# Altium PCB PCB1.PcbDoc
Units mil, origin at the board's own origin, x right, y up, seen from the top; angles counter-clockwise.
Board outline 6000 x 4000 mil, 2 copper layers (Top Layer, Bottom Layer); 17 components, 27 nets, 49 pads, 0 vias.
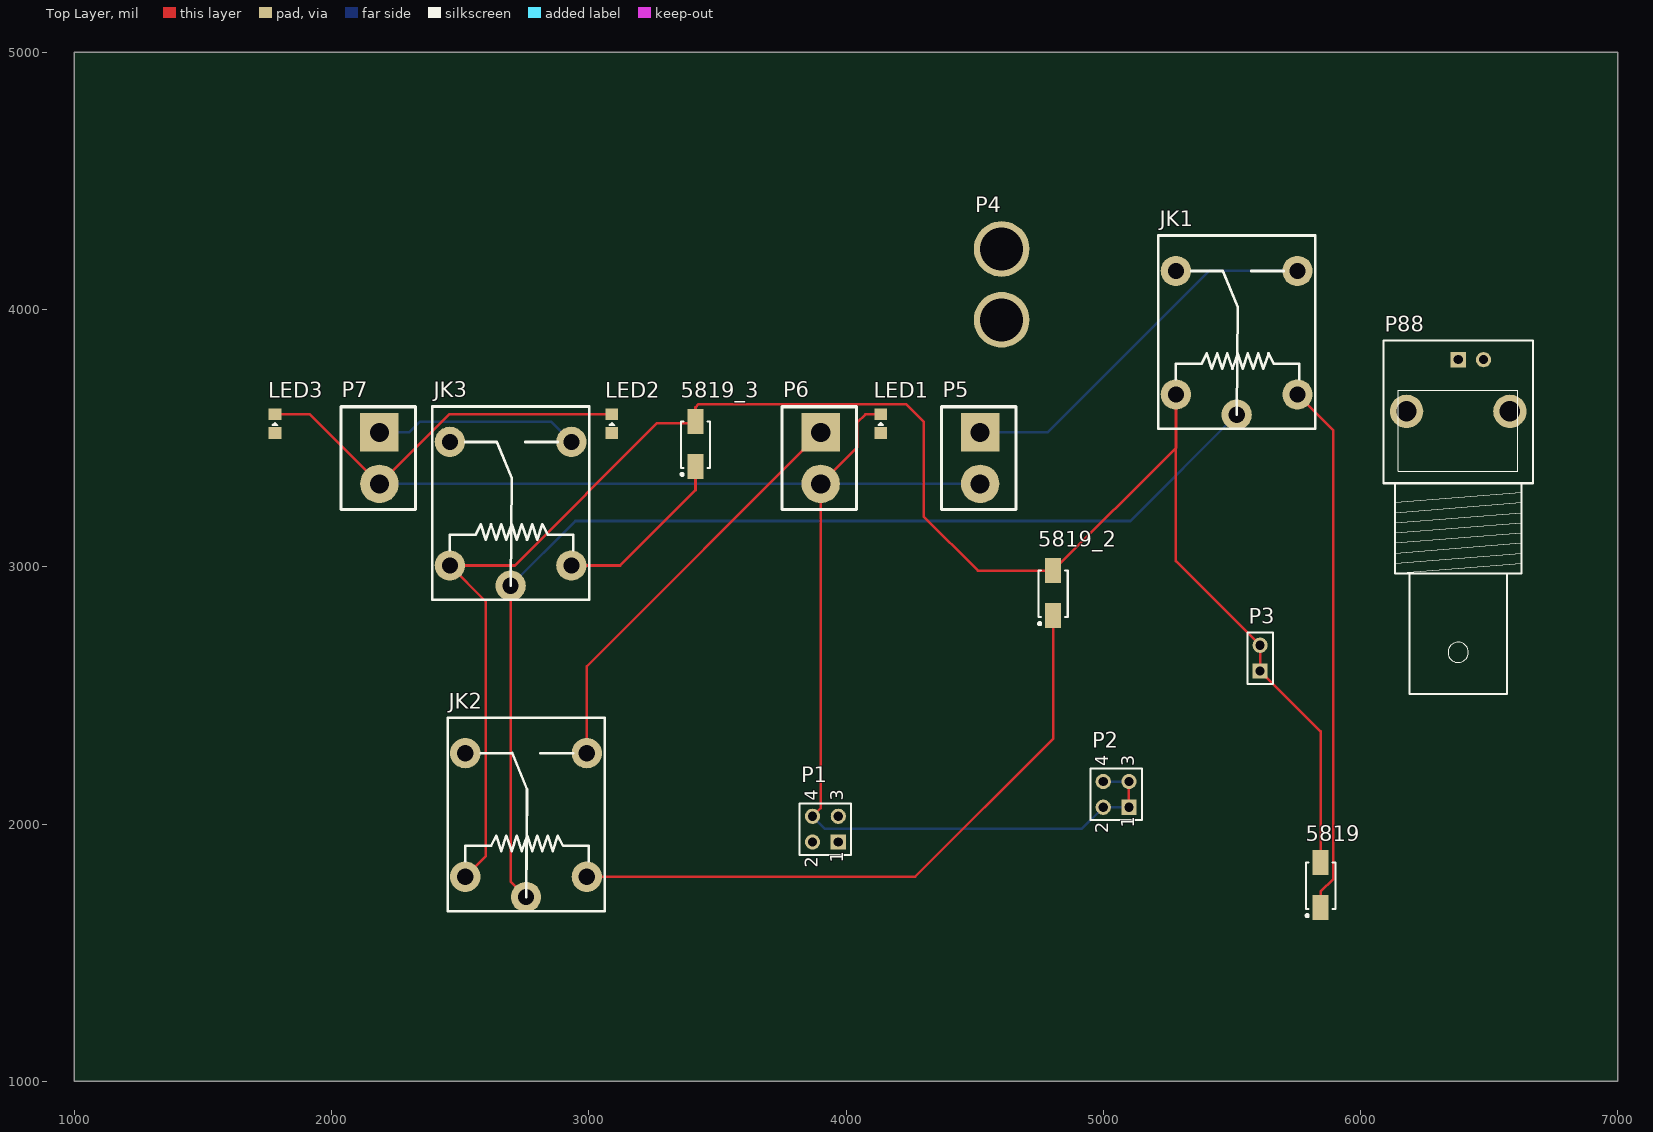
[diagram p0: Top Layer view]
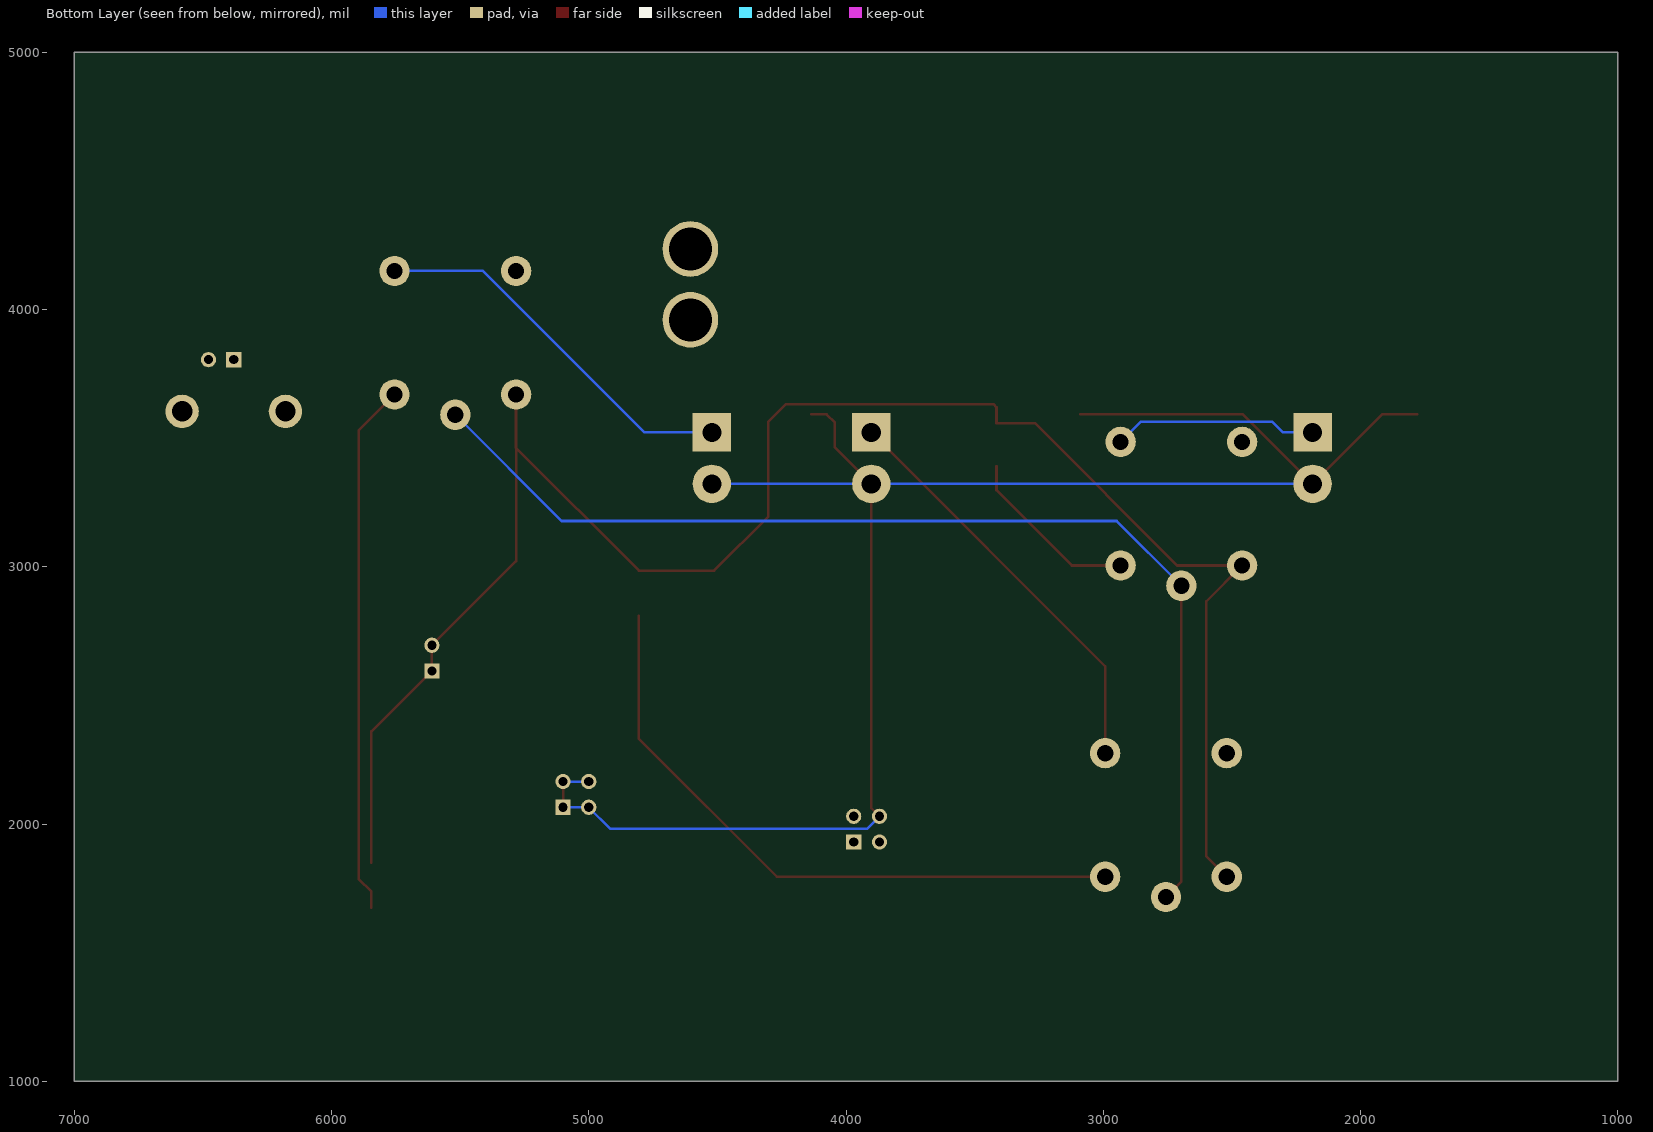
[diagram p1: Bottom Layer view, seen from below]

## Layer stack, top to bottom
Top Solder: solder mask 0.4, Solder Resist, Dk 3.5
Top Layer: signal copper 1.4
Dielectric 1: dielectric 12.6, FR-4, Dk 4.8
Bottom Layer: signal copper 1.4
Bottom Solder: solder mask 0.4, Solder Resist, Dk 3.5

## Board outline
1000,1000 7000,1000 7000,5000 1000,5000

## Design rules (kind name [scope] priority, off if disabled: settings)
Clearance [All] p1: gap=10 ignorepadtopadclearanceinfootprint=FALSE except(0: Arc-Hole Track-Hole SMDPad-Hole THPad-Hole Via-Hole Fill-Hole Poly-Hole Region-Hole Text-Hole)
PolygonConnect [All] p1: connectstyle=Relief reliefconductorwidth=10 reliefentries=4 polygonreliefangle="90 Angle" airgapwidth=10
RoutingVias [All] p1: holewidth=28 width=50 viastyle="Through Hole" minholewidth=28 minwidth=50 maxholewidth=28 maxwidth=50
SolderMaskExpansion [All] p1: expansion=4
Width [All] p1: maxlimit=10 minlimit=10 preferedwidth=10
30 further rules are at their usual default settings.

## Components (designator, comment, footprint, x,y, rotation, side; value= is the part's Value field where it differs from the comment)
5819 "SS14" SS14 5845,1760 r90 top
5819_2 "SS14" SS14 4805,2895 r90 top
5819_3 "SS14" SS14 3415,3475 r90 top
JK1 "SRD-05VDC-SL-C" SRD-C_B 5282.56,3669.68 r90 top
JK2 "SRD-05VDC-SL-C" SRD-C_B 2520,1795 r90 top
JK3 "SRD-05VDC-SL-C" SRD-C_B 2460,3005 r90 top
LED1 "LED0805" D0805 4135,3520 r90 top
LED2 "LED0805" D0805 3090,3520 r90 top
LED3 "LED0805" D0805 1780,3520 r90 top
P1 "Header 2X2" HDR2X2 3970,1930 r90 top
P2 "Header 2X2" HDR2X2 5100,2065 r90 top
P3 "Header 2" HDR1X2 5610,2595 r90 top
P4 "Header 2" XT60 4605,4235.59 r0 top
P5 "Header 2" CON2 4515,3425 r90 top
P6 "Header 2" CON2 3895,3425 r90 top
P7 "Header 2" CON2 2180,3425 r90 top
P88 "BNC" "BNC_RA CON" 6380,3805 r90 top

## Footprints (in the part's own frame and the unit in brackets; to place one, negate y for a bottom-side part, rotate by r counter-clockwise, add the part's x,y. Pads: shape width x height; smd on the part's side, far side on the other; paste and mask are expansions set on the pad)
"BNC_RA CON" [mm] "Connector; BNC Elbow"
  rect 1.5x1.5 hole 0.9: 1(0,0)
  round 3.3 hole 2: 2(-5.1,-5.1) 2(-5.1,5.1)
  round 1.5 hole 0.9: 2(0,-2.5)
  silkscreen extent -33,-7.4 1.9,7.4
CON2 [mil]
  rect 150x150 hole 75: 1(97.13,-6.29)
  round 150 hole 75: 2(-102.87,-6.29)
  silkscreen extent -203,-146 197,144
D0805 [mm]
  rect 1.15x1.25 smd: 1(0,0) 2(1.85,0)
  silkscreen extent 0.76,-0.25 1.02,0.25, body extent -0.08,-0.6 1.92,0.6, height 1.25
HDR1X2 [mm] "Connector; Header; 2 Position"
  rect 1.5x1.5 hole 0.9: 1(0,0)
  round 1.5 hole 0.9: 2(2.54,0)
  silkscreen extent -1.27,-1.27 3.81,1.27
HDR2X2 [mm] "Connector; Header; 2x2 Position"
  rect 1.5x1.5 hole 0.9: 1(0,0)
  round 1.5 hole 0.9: 2(0,2.54) 3(2.54,0) 4(2.54,2.54)
  silkscreen extent -1.27,-1.27 3.81,3.81
SRD-C_B [mm] "单刀双投"
  round 3 hole 1.6: 1(0,0) 2(0,-12) 3(-2,-6) 4(12.2,0) 5(12.2,-12)
  silkscreen extent -3.4,-13.75 15.7,1.75, body extent -3.4,-13.75 15.7,1.75, height 15.6
SS14 [mm]
  rect 2.45x1.55 smd: 1(-2.159,0) 2(2.286,0)
  silkscreen extent -3.07,-1.45 2.3,1.45, body extent -2.3,-1.45 2.3,1.45, height 1.8
XT60 [mm]
  round 5.5 hole 4.25: 0(0,0) 1(0,-7)

## Part data
JK1 JK2 JK3: "5V单路双控继电器", BOM名称=5V继电器, 学习资源=https://lmdzstyle.taobao.com/, 版权归属=黎明电子style
P1 P2: "Header, 2-Pin, Dual row", LatestRevisionDate=17-Jul-2002, LatestRevisionNote="Re-released for DXP Platform.", Publisher="Altium Limited"
P3 P4 P5 P6 P7: "Header, 2-Pin", LatestRevisionDate=17-Jul-2002, LatestRevisionNote="Re-released for DXP Platform.", Publisher="Altium Limited"
P88: "BNC Elbow Connector", LatestRevisionDate=17-Jul-2002, LatestRevisionNote="Re-released for DXP Platform.", Publisher="Altium Limited"

## Nets (pads, with @x,y where several pads share a name; then routed paths per layer and width w, separated by ;. In a path a pad name is that pad's centre, name@x,y a point inside that pad or via, vN(x,y) a via of type N, cw(c..) or ccw(c..) an arc to the next point about the centre after c; other vN are vias at no path point)
5V: 5819.2 5819_2.2 5819_3.2 JK1.1 JK2.1 JK3.1 P3.1 P3.2 | length 7360.7
  Top Layer w10: JK2.1 2599,1874 2599,2866 JK3.1 2713,3005 3266,3558 3415,3558 5819_3.2 3415,3620 3427,3632 4234,3632 4302,3564 4302,3196 4513,2985 5819_2.2 5282.56,3462.56 ; 5819.2 5845,2360 P3.1 P3.2 5282.56,3022.44 5282.56,3462.56 ; 5282.56,3462.56 5283,3463 5283,3669.69 JK1.1 5282.56,3462.56
12V: P4.1
24V: JK1.3 JK2.3 JK3.3 | length 4332.7
  Top Layer w10: JK3.3 2696.22,1776.26 JK2.3
  Bottom Layer w10: JK3.3 2947.96,3178 5105.84,3178 JK1.3
EGND: 
GND: LED1.2 LED2.2 LED3.2 P1.4 P2.1 P2.2 P2.3 P2.4 P5.2 P6.2 P7.2 | length 7062.3
  Top Layer w10: LED3.2 1915.58,3592.83 P7.2 2457,3592.83 LED2.2 ; P1.4 3901.29,2061.29 P6.2 4043,3463.83 4043,3560 4075.83,3592.83 LED1.2 ; P2.1 P2.3
  Bottom Layer w10: P7.2 2187.17,3323 3900.42,3323 P6.2 P5.2 ; P1.4 3919,1981 4916,1981 P2.2 P2.1 ; P2.4 P2.3
Net5819_1: 5819.1 JK1.2 | length 2073.4
  Top Layer w10: JK1.2 5895,3529.69 5895,1787 5845,1737 5819.1
Net5819_2_1: 5819_2.1 JK2.2 | length 2513.6
  Top Layer w10: JK2.2 4269,1795 4805,2331 5819_2.1
Net5819_3_1: 5819_3.1 JK3.2 | length 695.9
  Top Layer w10: JK3.2 3122,3005 3415,3298 5819_3.1
NetC4_1: 
NetC4_2: 
NetC7_1: 
NetC10_1: 
NetC11_2: 
NetLED1_1: LED1.1
NetLED2_1: LED2.1
NetLED3_1: LED3.1
NetQ1_1: 
NetQ2_1: 
NetQ3_1: 
NetR5_2: 
OUT1: JK1.5 P5.1 | length 1493.8
  Bottom Layer w10: P5.1 4784.13,3522.13 5412,4150 JK1.5
OUT2: JK2.5 P6.1 | length 1623.3
  Top Layer w10: JK2.5 2992.44,2613.28 P6.1
OUT3: JK3.5 P7.1 | length 796.1
  Bottom Layer w10: P7.1 2302,3522.13 2343.87,3564 2853.76,3564 JK3.5
PWM1: P1.1
PWM2: P1.2
PWM3: P1.3
SERVO_5V: 
pads on no net: JK1.4 JK2.4 JK3.4 P4.0 P88.1 P88.2

## Text inside footprints (layer, text, board x,y; h text height)
P1: Top Overlay "1" at 3990,1850 h50 r90; Top Overlay "2" at 3890,1830 h50 r90; Top Overlay "4" at 3890,2090 h50 r90; Top Overlay "3" at 3990,2090 h50 r90
P2: Top Overlay "1" at 5120,1985 h50 r90; Top Overlay "2" at 5020,1965 h50 r90; Top Overlay "4" at 5020,2225 h50 r90; Top Overlay "3" at 5120,2225 h50 r90